# Altium PCB PCB1.PcbDoc
Units mil, origin at the board's own origin, x right, y up, seen from the top; angles counter-clockwise.
Board outline 1556 x 1115 mil, 2 copper layers (Top Layer, Bottom Layer); 11 components, 20 nets, 59 pads, 91 vias.
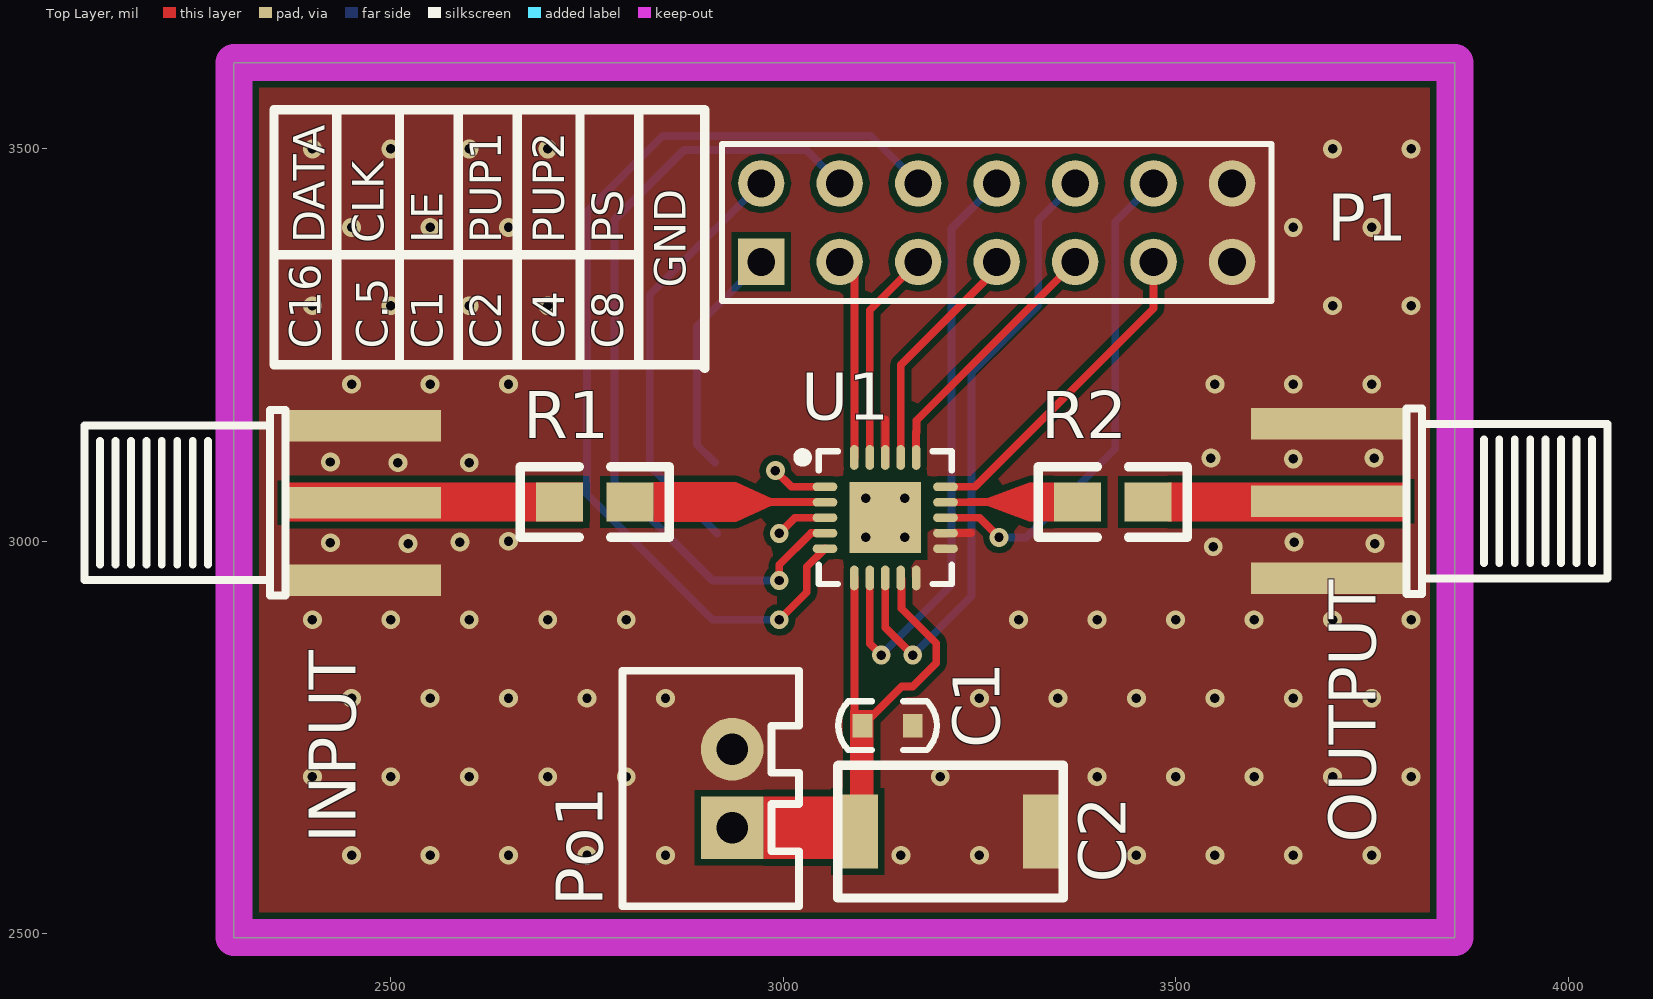
[diagram p0: Top Layer view]
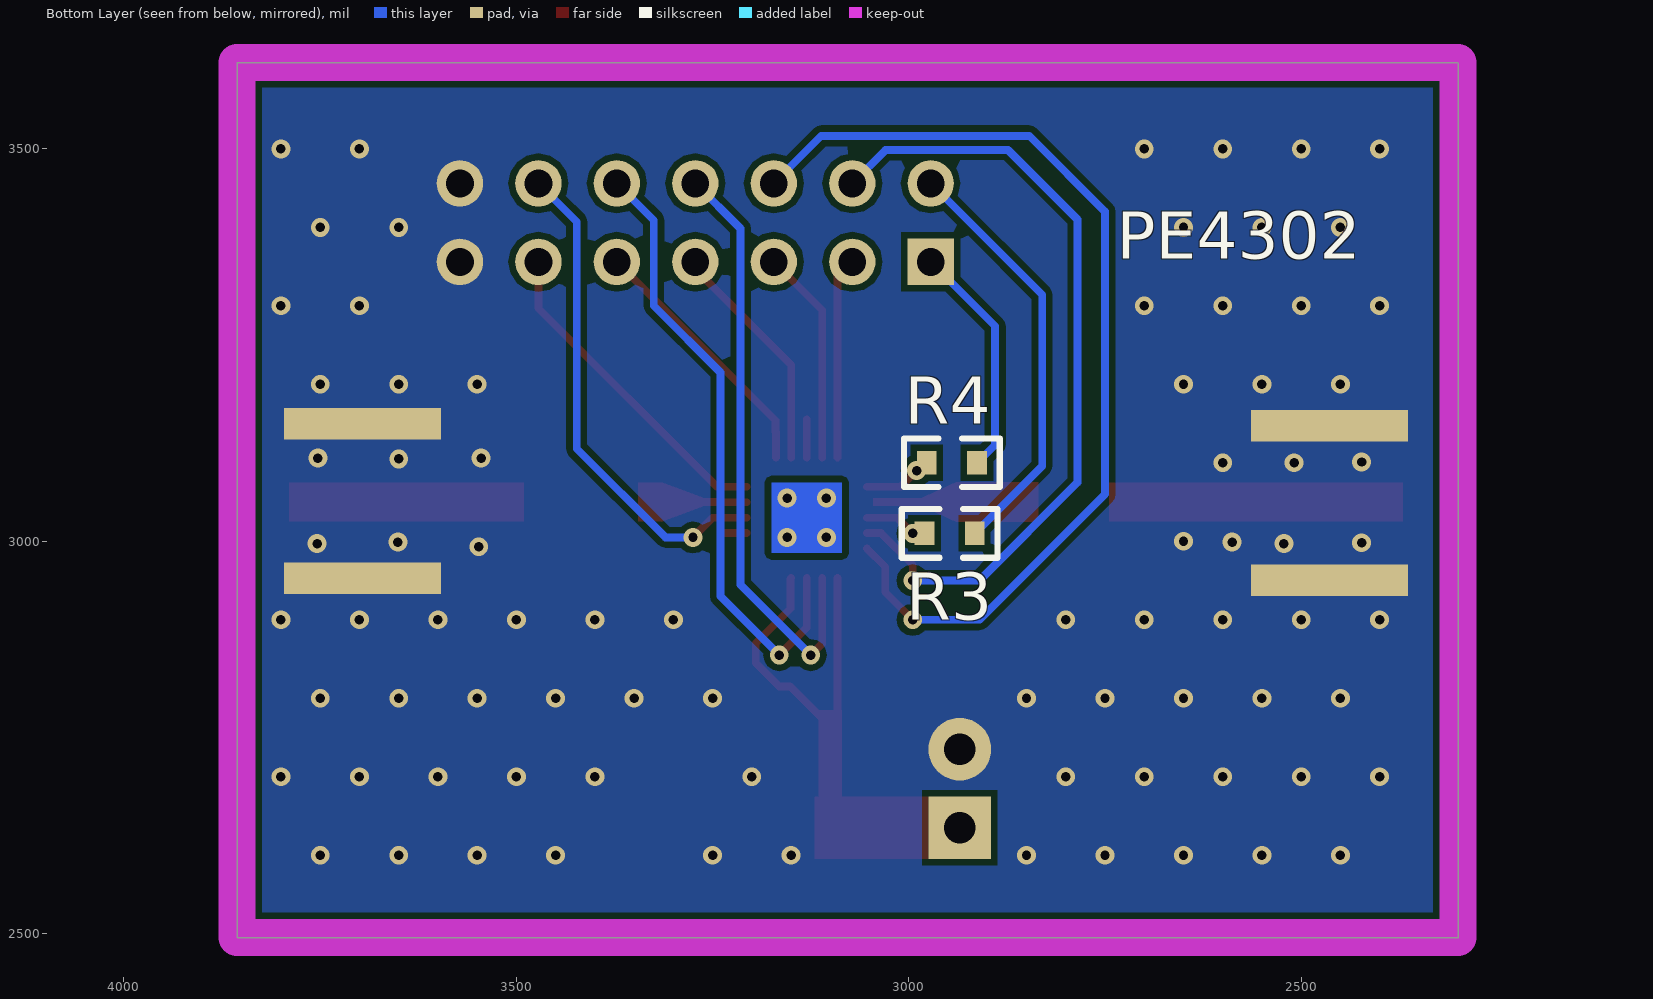
[diagram p1: Bottom Layer view, seen from below]

## Layer stack, top to bottom
Top Solder: solder mask 0.4, Solder Resist, Dk 3.5
Top Layer: signal copper 1.4
Dielectric 1: dielectric 12.6, FR-4, Dk 4.8
Bottom Layer: signal copper 1.4
Bottom Solder: solder mask 0.4, Solder Resist, Dk 3.5

## Board outline
2300,2495 2300,3610 3856,3610 3856,2495

## Design rules (kind name [scope] priority, off if disabled: settings)
Clearance [All] p1: gap=8
PlaneConnect [All] p1: planeconnectstyle=Direct reliefexpansion=20 reliefentries=4 reliefconductorwidth=10 reliefairgap=10
PolygonConnect [All] p1: connectstyle=Direct reliefconductorwidth=10 reliefentries=4 polygonreliefangle="90 Angle" airgapwidth=10
RoutingVias [All] p1: holewidth=28 width=50 viastyle="Through Hole" minholewidth=28 minwidth=50 maxholewidth=28 maxwidth=50
SolderMaskExpansion [All] p1: expansion=4
Width [All] p1: maxlimit=10 minlimit=10 preferedwidth=10
29 further rules are at their usual default settings.

## Components (designator, comment, footprint, x,y, rotation, side; value= is the part's Value field where it differs from the comment)
C1 "0.1uf" 0603C 3165,2765 r180 top
C2 "4.7uf" "7343-31 TYPE D" 3069.41,2545.35 r0 top
INPUT "差分输出" SMA-LYING 2405,3045 r0 top (schematic designator Vo_S1)
OUTPUT "差分输出" SMA-LYING 3755,3055 r180 top (schematic designator Vo_S2)
P1 "Header 7X2" HDR2X7 2972,3356 r0 top
Po1 "Power_2Port" Power_S_2Port 2935,2635 r90 top
R1 "50" 0805 2715,3050 r0 top
R2 "50" 0805 3375,3050 r0 top
R3 "10k" 0603R 2948,3010 r0 bottom
R4 "10k" 0603R 2945,3100 r180 bottom
U1 "PE4302" LC-QFN-20_4x4x05P 3130,3030 r270 top

## Footprints (in the part's own frame and the unit in brackets; to place one, negate y for a bottom-side part, rotate by r counter-clockwise, add the part's x,y. Pads: shape width x height; smd on the part's side, far side on the other; paste and mask are expansions set on the pad)
0603C [mil]
  rect 25x30 smd: 1(0,0) 2(64,0)
  silkscreen extent -31,-31 95,31
0603R [mil]
  rect 25x30 smd: 1(-32,0) 2(32,0)
  silkscreen extent -61,-31 61,31
0805 [mil]
  rect 60x50 smd: 1(0,0) 2(90,0)
  silkscreen extent -50,-45 140,45
"7343-31 TYPE D" [mm]
  rect 1.3x2.4 smd: 1(0.65,2.15) 2(6.65,2.15)
  silkscreen extent 0,0 7.3,4.3
HDR2X7 [mm] "Connector; Header; 7x2 Position"
  rect 1.5x1.5 hole 0.9: 1(0,0)
  round 1.5 hole 0.9: 2(0,2.54) 3(2.54,0) 4(2.54,2.54) 5(5.08,0) 6(5.08,2.54) 7(7.62,0) 8(7.62,2.54) 9(10.16,0) 10(10.16,2.54) 11(12.7,0) 12(12.7,2.54) 13(15.24,0) 14(15.24,2.54)
  silkscreen extent -1.27,-1.27 16.51,3.81
LC-QFN-20_4x4x05P [mm]
  rect 2.3x2.3 smd mask+0.051: 0(0,0)
  oval 0.28x0.8 smd mask+0.051: 1(-1,-1.95) 2(-0.5,-1.95) 3(0,-1.95) 4(0.5,-1.95) 5(1,-1.95) 11(1,1.95) 12(0.5,1.95) 13(0,1.95) 14(-0.5,1.95) 15(-1,1.95)
  oval 0.8x0.28 smd mask+0.051: 6(1.95,-1) 7(1.95,-0.5) 8(1.95,0) 9(1.95,0.5) 10(1.95,1) 16(-1.95,1) 17(-1.95,0.5) 18(-1.95,0) 19(-1.95,-0.5) 20(-1.95,-1)
  silkscreen extent -2.15,-2.82 2.15,2.15
Power_S_2Port [mil]
  rect 80x80 hole 40: 1(0,0)
  round 80 hole 40: 2(100,0)
  silkscreen extent -100,-85 200,140
SMA-LYING [mm]
  rect 5.08x1.016 smd: 0(1.5,0.1) 1(1.5,-2.4) 1(1.5,2.6)
  rect 5.08x1.016 smd far side: 1(1.5,-2.4) 1(1.5,2.6)
  silkscreen extent -7.5,-2.9 -1,3.1

## Part data
C1: library part Cap
C2: library part "Tantalium Cap"
INPUT OUTPUT: library part SMA
P1: "Header, 7-Pin, Dual row"
R1 R2 R3 R4: library part Res

## Via types
v1: diameter 24, hole 12, Top Layer to Bottom Layer, 91 vias

## Nets (pads, with @x,y where several pads share a name; then routed paths per layer and width w, separated by ;. In a path a pad name is that pad's centre, name@x,y a point inside that pad or via, vN(x,y) a via of type N, cw(c..) or ccw(c..) an arc to the next point about the centre after c; other vN are vias at no path point)
C1: P1.5 U1.19 | length 274.8
  Top Layer w10: U1.19 3110.31,3294.31 P1.5
C2: P1.7 U1.17 | length 299.9
  Top Layer w10: U1.17 3149.68,3224.68 3272,3347 P1.7
C4: P1.9 U1.16 | length 333
  Top Layer w10: U1.16 3169.37,3139.37 ; 3169.68,3139.37 3169.68,3153.68 P1.9
C8: P1.11 U1.15 | length 418.5
  Top Layer w10: U1.15 3244.37,3069.37 3472,3297 P1.11
C16: R4.1 U1.1 | length 71.8
  Top Layer w10: v1(2990,3090) 3010.63,3069.37 U1.1
C.5: P1.3 U1.20 | length 256.9
  Top Layer w10: P1.3 3090.63,3337.37 U1.20
CLK: P1.4 U1.4 | length 1033
  Top Layer w10: v1(2995,2950) 2995,2970 3035.32,3010.32 U1.4
  Bottom Layer w10: v1(2995,2950) 2910,2950 2785,3075 2785,3410 2873.53,3498.53 3029.47,3498.53 P1.4
DATA: R3.2 U1.3 | length 66.5
  Top Layer w10: v1(2995,3010) 3015,3030 U1.3
GND: C1.1 C2.2 INPUT.1 OUTPUT.1 P1.13 P1.14 Po1.2 U1.10 U1.11 U1.12 U1.18 | length 81.1
  Top Layer w10: U1.18 3130,3155 ; U1.12 3239.68,3010.32
  other v1: 2450,2600 2550,2600 2650,2600 2750,2600 2850,2600 3150,2600 3250,2600 3450,2600 3550,2600 3650,2600 3750,2600 2400,2700 2500,2700 2600,2700 2700,2700 2800,2700 3200,2700 3400,2700 3500,2700 3600,2700 3700,2700 3800,2700 2450,2800 2550,2800 2650,2800 2750,2800 2850,2800 3250,2800 3350,2800 3450,2800 3550,2800 3650,2800 3750,2800 2400,2900 2500,2900 2600,2900 2700,2900 2800,2900 3300,2900 3400,2900 3500,2900 3600,2900 3700,2900 3800,2900 3548,2993 2522,2997 3754,2997 2423,2998 2588,2999 3651,2999 2650,3000 2509,3100 2600,3100 2423,3101 3650,3105 3545,3106 3753,3106 2450,3200 2550,3200 2650,3200 3550,3200 3650,3200 3750,3200 2400,3300 2500,3300 2600,3300 2700,3300 3700,3300 3800,3300 2450,3400 2550,3400 2650,3400 3650,3400 3750,3400 2400,3500 2500,3500 2600,3500 2700,3500 3700,3500 3800,3500
LE: P1.6 U1.5 | length 1273.1
  Top Layer w10: v1(2995,2900) 3030,2935 3030,2967.4 U1.5
  Bottom Layer w10: v1(2995,2900) 2910,2900 2750,3060 2750,3420 2846.53,3516.53 3111.47,3516.53 P1.6
NetC1_2: C1.2 C2.1 Po1.1 U1.6 U1.9 | length 438.5
  Top Layer w10: U1.6 3090.63,2779.37 3091,2779 C1.2@3101,2779 ; C1.2 3151,2815 3165,2815 3195,2845 3195,2870 3150.86,2914.14 3150.86,2952.06 U1.9
NetP1_1: P1.1 R4.2 | length 299.5
  Bottom Layer w10: R4.2 2890,3123 2890,3274 P1.1
NetP1_2: P1.2 R3.1 | length 540.4
  Bottom Layer w10: R3.1 2830,3096 2830,3314 P1.2
NetR1_1: INPUT.0 R1.1
NetR1_2: R1.2 U1.2
NetR2_1: R2.1 U1.14 | length 32.9
  Top Layer w10: U1.14 3239.69,3049.69
NetR2_2: OUTPUT.0 R2.2
PS: P1.12 U1.13 | length 631.7
  Top Layer w10: U1.13 3250,3030 v1(3275,3005)
  Bottom Layer w10: v1(3275,3005) 3310,3005 3423,3118 3423,3407 P1.12
PUP1: P1.8 U1.7 | length 766.2
  Top Layer w10: U1.7 3110.31,2869.69 v1(3125,2855)
  Bottom Layer w10: v1(3125,2855) 3214.53,2944.53 3214.53,3398.53 P1.8
PUP2: P1.10 U1.8 | length 799.5
  Top Layer w10: U1.8 3130,2890 v1(3165,2855)
  Bottom Layer w10: v1(3165,2855) 3240,2930 3240,3215 3325,3300 3325,3409 P1.10
pads on no net: U1.0
copper on no net:
  other v1: 3105,3005 3155,3005 3105,3055 3155,3055

## Polygon pours and split planes (outlines as drawn)
GND on Top Layer "Top Layer-No Net" (solid, pour order 10): 2300,2495 3856,2495 3856,3610 2300,3610
GND on Bottom Layer "Top Layer-No Net" (solid, pour order 12): 2300,3610 2300,2495 3856,2495 3856,3610

## Keep-outs
Keep-Out Layer:
  the board outline again, w47.24

## Other copper
Top Layer:
  rectangle net NetC1_2: 2975,2595 3120,2675
  rectangle net NetC1_2: 3085,2660 3115,2785
  rectangle net NetR2_1: 3315,3025 3345,3075
  rectangle net NetR2_2: 3490,3025 3790,3075
  rectangle net NetR1_1: 2370,3025 2745,3075
  region net NetR2_1: 3235,3055 3260,3055 3315,3075 3315,3025 3260,3045 3235,3045
  region net NetR1_2: 2835,3075 2940,3075 2985,3055 3045,3055 3045,3045 2985,3045 2940,3025 2835,3025
Bottom Layer:
  rectangle: 3085,2985 3175,3075

## Silkscreen, mask and mechanical layers (free items; w line width, h text height)
Top Overlay:
  lines w11.81: 2351,3365 2816,3365 2816,3550 ; 2431,3230 2431,3550 ; 2511,3225 2511,3550 ; 2586,3230 2586,3550 ; 2661,3230 2661,3550 ; 2741,3230 2741,3550 ; 2816,3420 2816,3225 ; 2816,3225 2351,3225 2351,3550 2816,3550 ; 2816,3225 2895,3225 2900,3220 2900,3550 2816,3550
  text "DATA" at 2416,3380 h40 r90
  text "CLK" at 2491,3380 h40 r90
  text "LE" at 2566,3380 h40 r90
  text "PUP1" at 2641,3380 h40 r90
  text "PUP2" at 2721,3380 h40 r90
  text "PS" at 2796,3380 h40 r90
  text "GND" at 2876,3323 h40 r90
  text "C16" at 2411,3245 h40 r90
  text "C.5" at 2496,3245 h40 r90
  text "C1" at 2566,3245 h40 r90
  text "C2" at 2641,3245 h40 r90
  text "C4" at 2721,3245 h40 r90
  text "C8" at 2796,3245 h40 r90
Bottom Overlay:
  text "PE4302" at 2735,3360 h60